# Altium PCB YQY.PcbDoc
Units mil, origin at the board's own origin, x right, y up, seen from the top; angles counter-clockwise.
Board outline 3346 x 2125 mil, 4 copper layers (Top Layer, Internal Plane 1, Internal Plane 2, Bottom Layer); 20 components, 16 nets, 81 pads, 0 vias.
Unrouted connection lines stored in the file: 59.
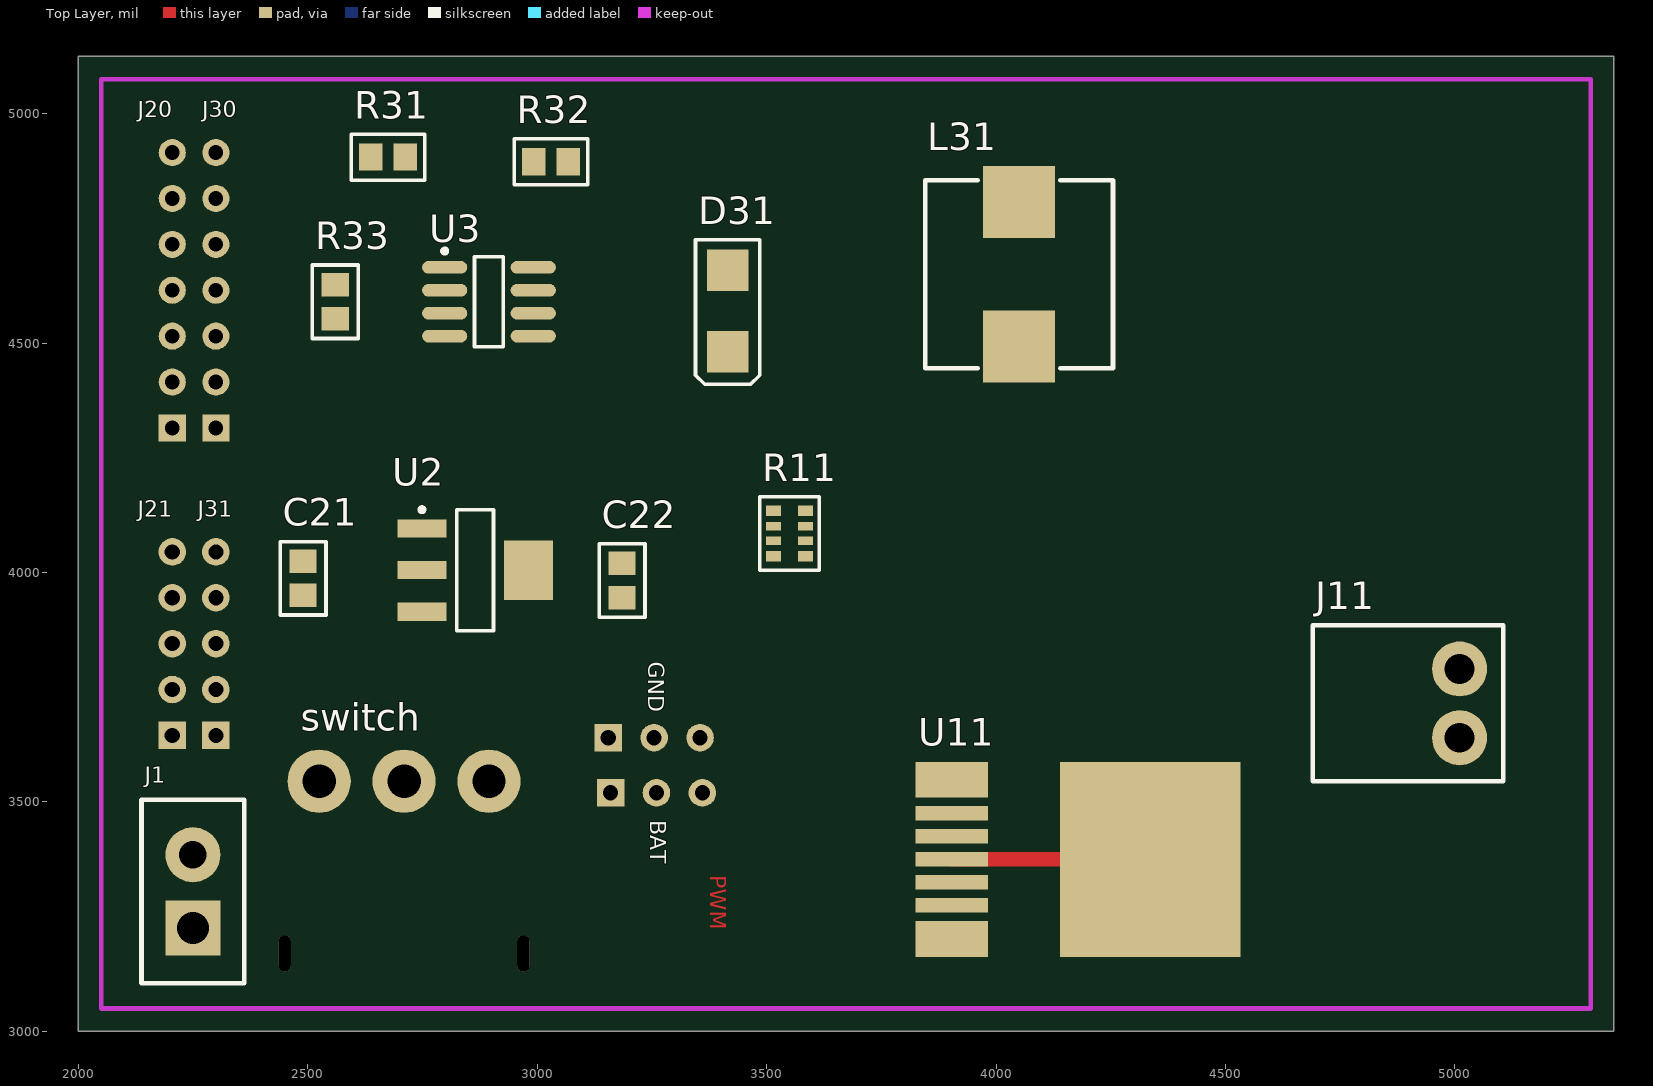
[diagram p0: Top Layer view]
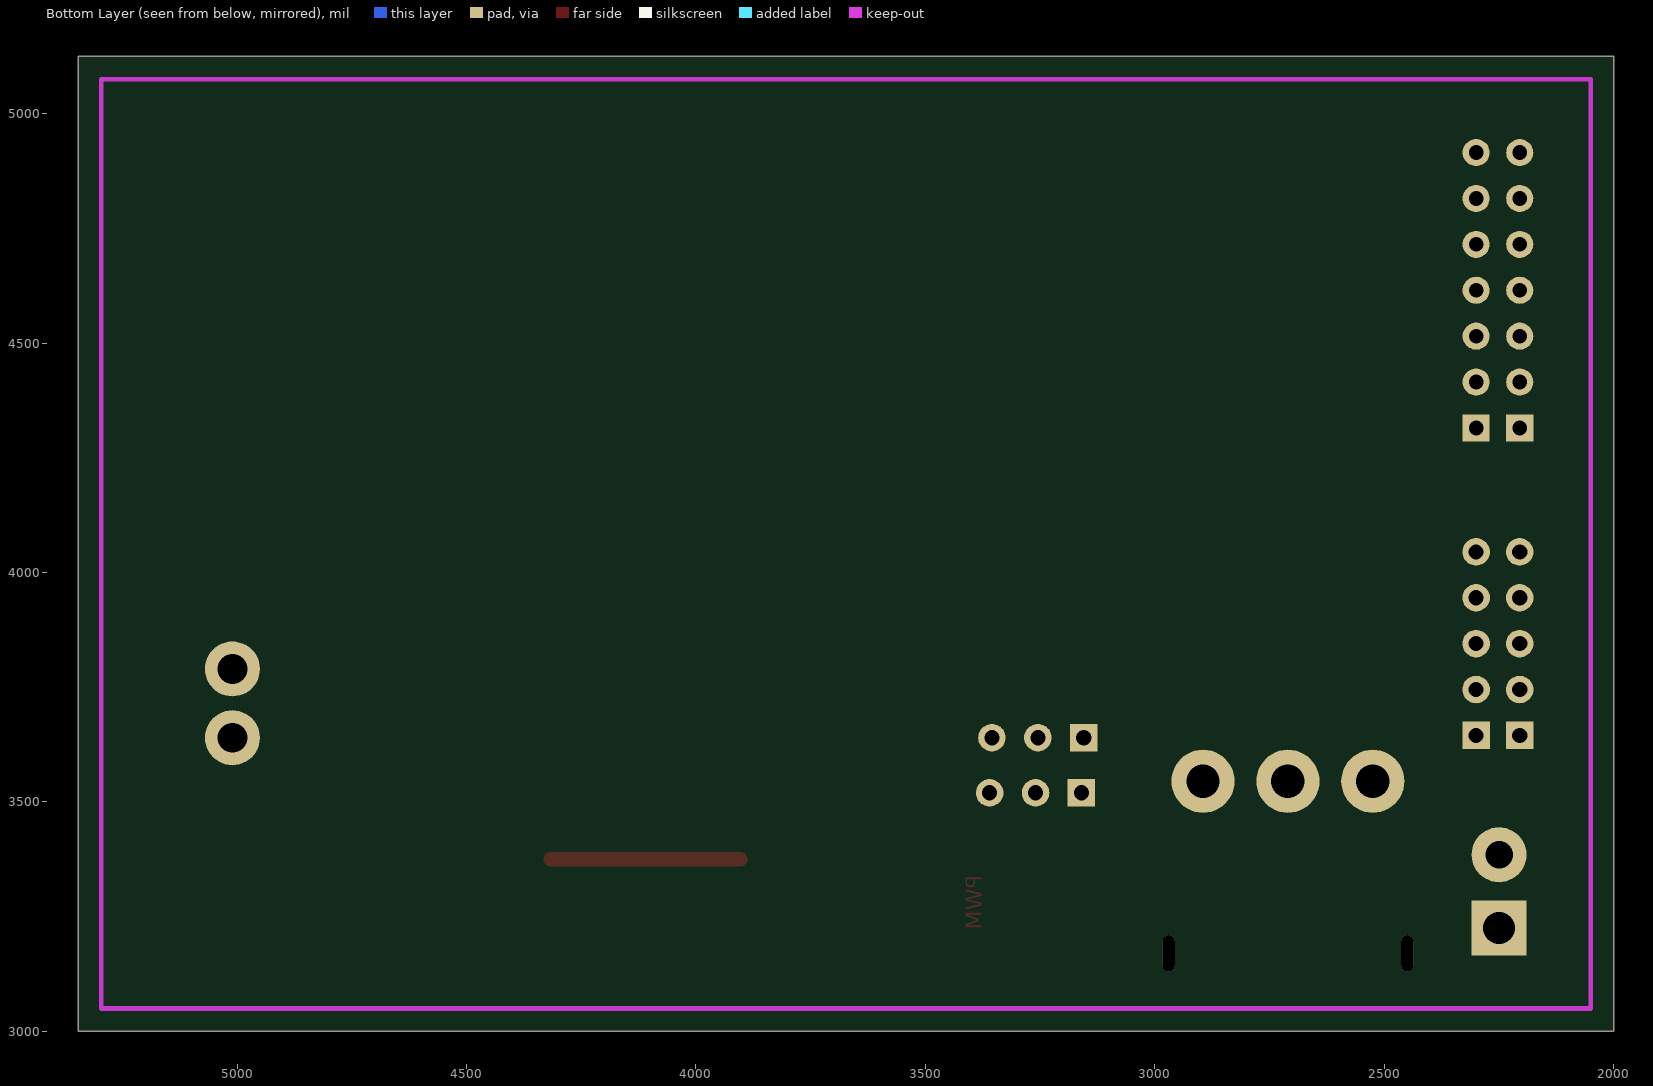
[diagram p1: Bottom Layer view, seen from below]
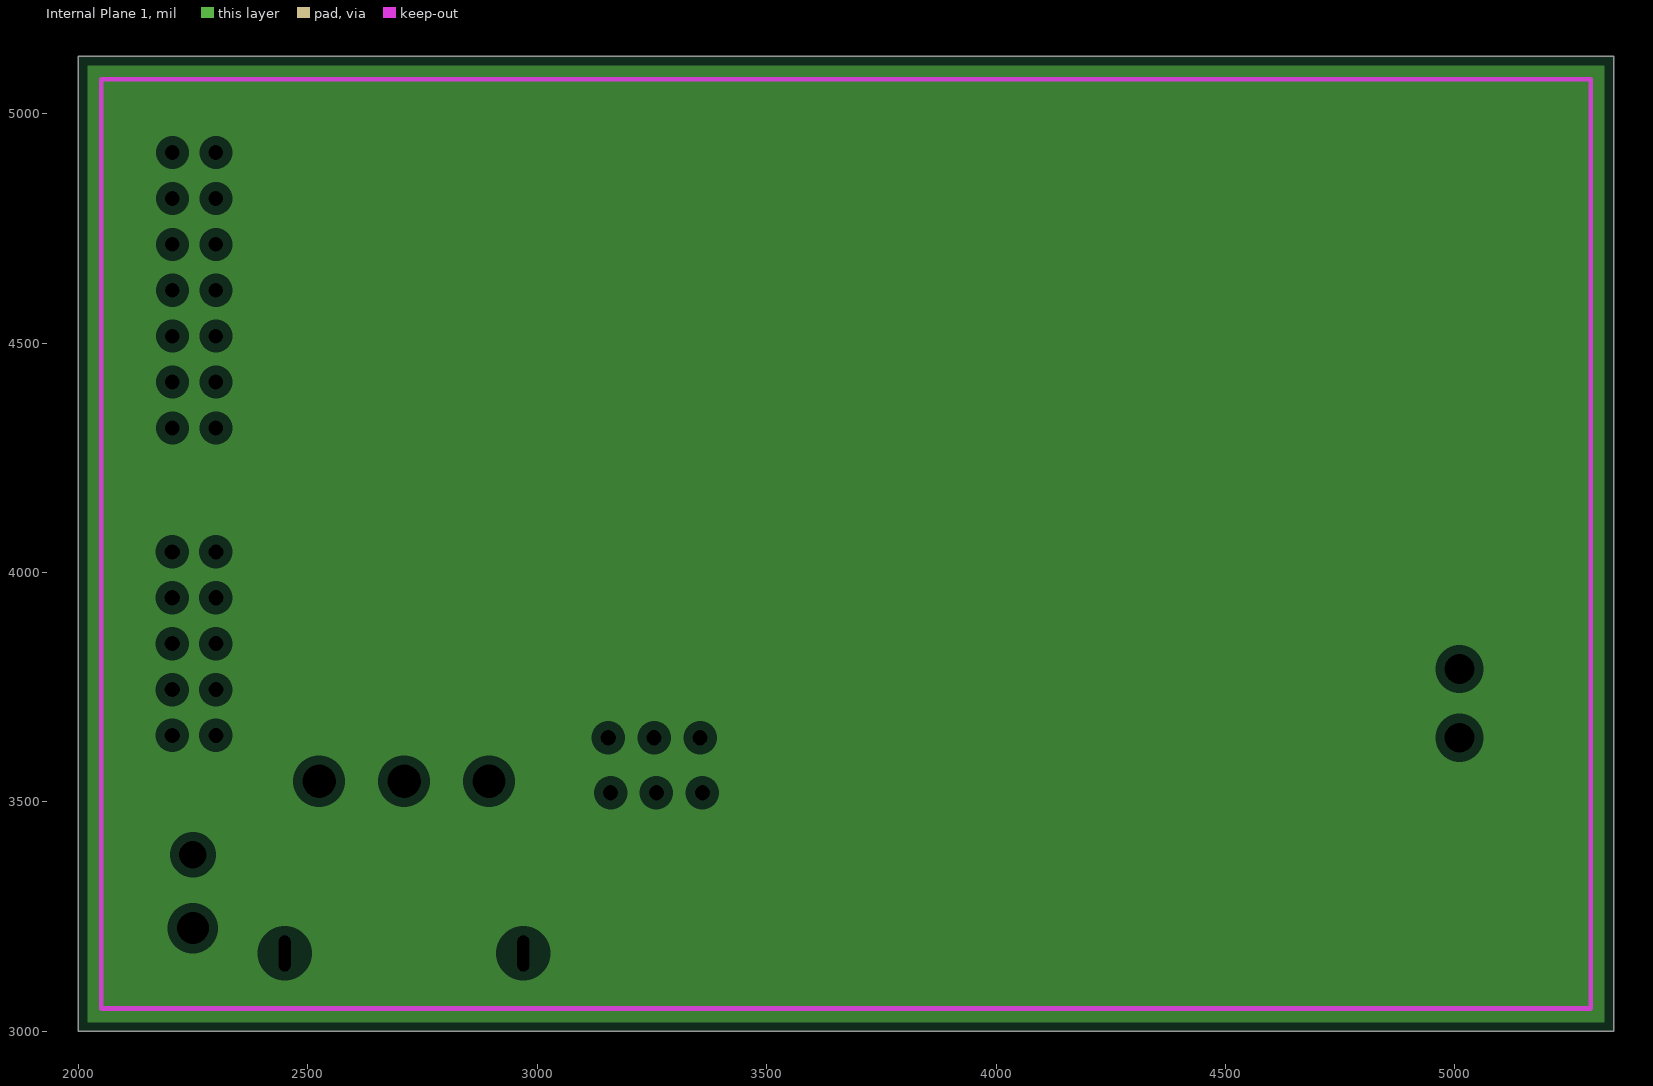
[diagram p2: Internal Plane 1, clearances drawn from the general rule]
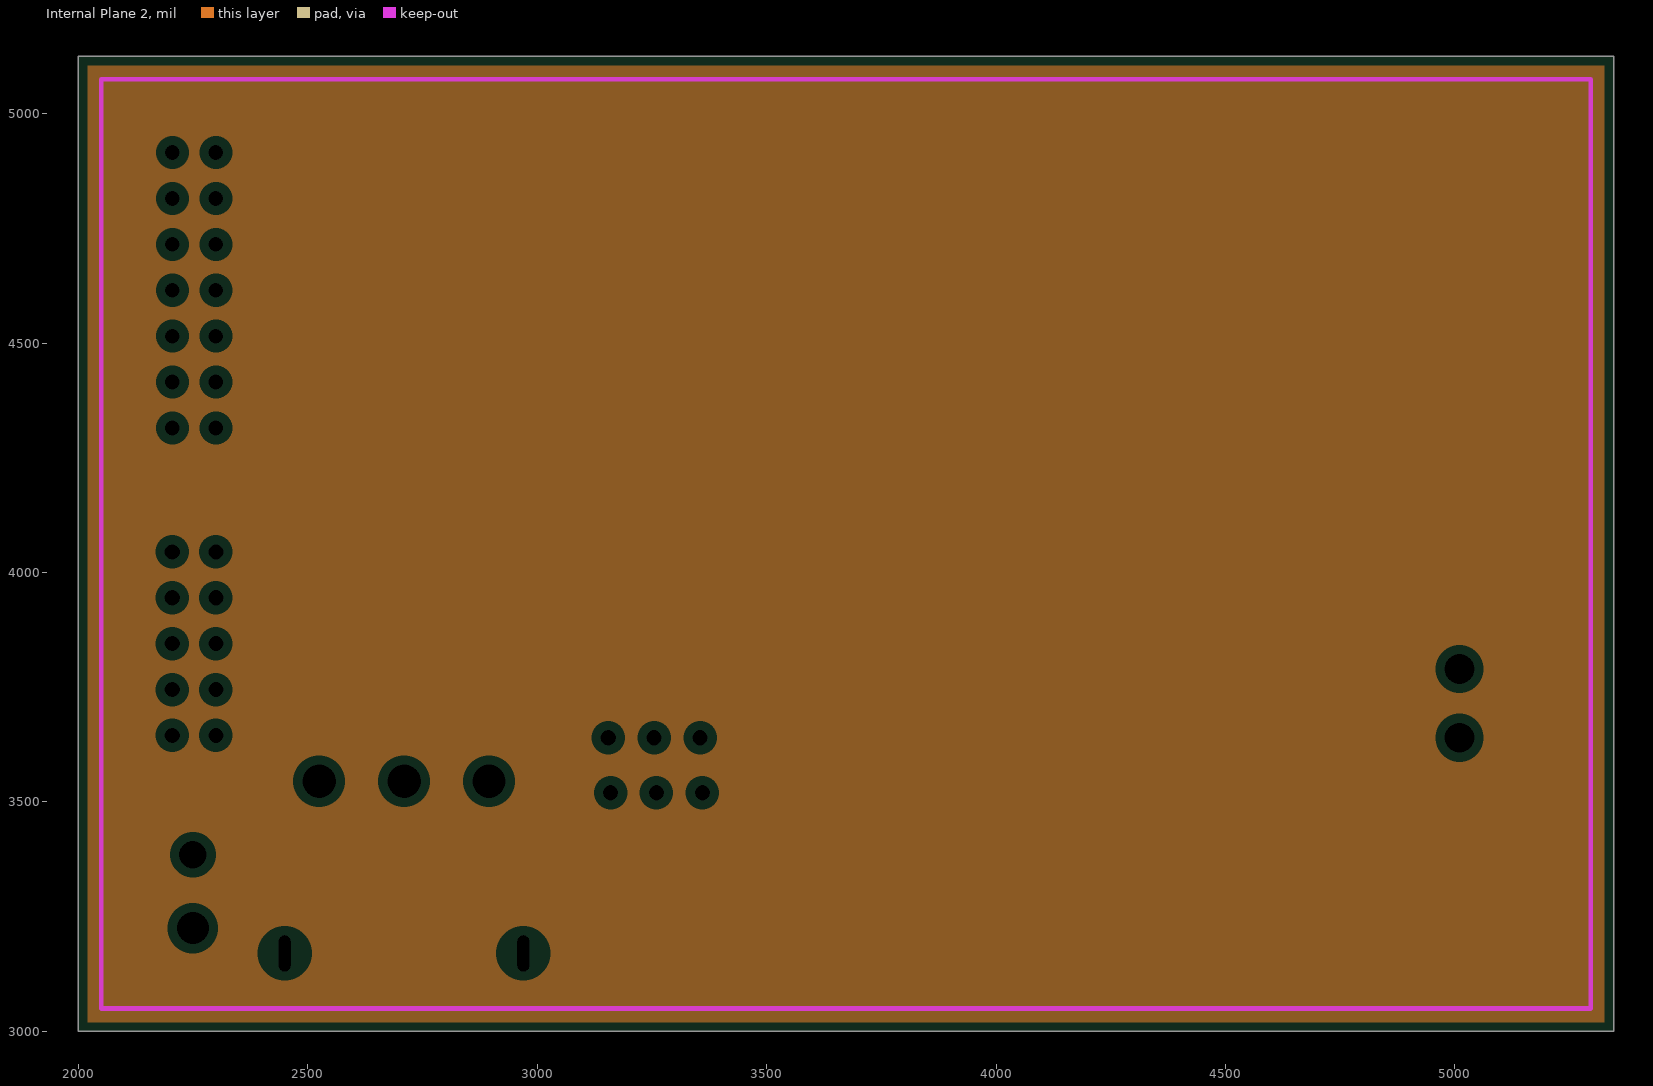
[diagram p3: Internal Plane 2, clearances drawn from the general rule]

## Layer stack, top to bottom
Top Layer: signal copper 1.4
Dielectric: dielectric 12.6, FR-4, Dk 4.8
Internal Plane 1: plane copper 1.4
Dielectric: dielectric 12.6, FR-4, Dk 4.8
Internal Plane 2: plane copper 1.4
Dielectric: dielectric 12.6, FR-4, Dk 4.8
Bottom Layer: signal copper 1.4

## Board outline
2000,3000 5346,3000 5346,5125 2000,5125

## Design rules (kind name [scope] priority, off if disabled: settings)
Clearance [All] p1: gap=8
PlaneClearance [All] p1: clearance=20
PlaneConnect [All] p1: planeconnectstyle=Relief reliefexpansion=20 reliefentries=4 reliefconductorwidth=10 reliefairgap=10
PolygonConnect [All] p1: connectstyle=Relief reliefconductorwidth=10 reliefentries=4 polygonreliefangle="90 Angle"
RoutingVias [All] p1: holewidth=25 width=40 viastyle="Through Hole" minholewidth=28 minwidth=50 maxholewidth=28 maxwidth=50
SilkscreenOverComponentPads [All] p1: minsilkscreentomaskgap=10
SolderMaskExpansion [All] p1: expansion=4
Width [All] p1: maxlimit=8 minlimit=8 preferedwidth=8
25 further rules are at their usual default settings.

## Components (designator, comment, footprint, x,y, rotation, side; value= is the part's Value field where it differs from the comment)
BAT "3 端口" SIP3 3260,3520 r0 top (schematic designator J32)
C21 "10uF" 0805 2490,3987.4 r90 top
C22 "10uF" 0805 3185,3982.4 r90 top
D31 "SK54" SMC/DO-214AB 3415,4570 r270 top
GND "3 端口" SIP3 3255,3640 r0 top (schematic designator J22)
J1 "电源接口" DC12V 2250,3305 r90 top
J11 "马达接口" MOTOR-W 5010,3715 r90 top
J20 "7 端口" SIP7 2205,4565 r90 top
J21 "5 端口" SIP5 2205,3845 r90 top
J30 "7 端口" SIP7 2300,4565 r90 top
J31 "5 端口" SIP5 2300,3845 r90 top
L31 "15uH" 4040电感 4050,4650 r270 top
R11 "10K" PZ-4 3550,4085 r90 top
R31 "6.8K" 0805 2675,4905 r180 top
R32 "1.3K" 0805 3030,4895 r180 top
R33 "2.7K" 0805 2560,4590 r90 top
switch "开关" 5A120V开关 2710,3170 r0 top (schematic designator 拨动开关)
U2 "AMS1117-3.3" MP04A_M 2865,4005 r0 top
U3 "AS1015" SOP8_M 2895,4590 r0 top
U11 "BTN7971B" TO263-7-1 4100,3375 r270 top

## Footprints (in the part's own frame and the unit in brackets; to place one, negate y for a bottom-side part, rotate by r counter-clockwise, add the part's x,y. Pads: shape width x height; smd on the part's side, far side on the other; paste and mask are expansions set on the pad)
5A120V开关 [mm]
  round 3.5 hole 1.85: 1(0,9.53) 2(4.7,9.53) ""(-4.7,9.53)
  oval 0.66x2 hole 0.66 slot 2 at 90 deg: ""(-6.605,0) ""(6.605,0)
0805 [mm]
  rect 1.3x1.5 smd: 1(-0.95,0) 2(0.95,0)
  silkscreen extent -2.03,-1.27 2.03,1.27
4040电感 [mm]
  rect 4x4 smd: 1(-4,0) 2(4,0)
  silkscreen extent -5.2,-5.2 5.2,5.2
DC12V [mil]
  rect 120x120 hole 70: 1(-80,0)
  round 120 hole 60: 2(80,0)
  silkscreen extent -200,-112 200,112
MOTOR-W [mil]
  round 120 hole 65: 1(-75,0) 2(75,0)
  silkscreen extent -170,-95 170,320
MP04A_M [mm] "SOT223, 4-Leads, Body 6.5x3.5mm, Pitch 2.3mm, Lead Span 7mm, IPC Low Density"
  rect 2.7x1 smd: 1(-2.95,2.3) 2(-2.95,0) 3(-2.95,-2.3)
  rect 2.7x3.3 smd: 4(2.95,0)
  silkscreen extent -3.07,-3.35 1.02,3.47
PZ-4 [mm] "WWW.OURAVR.COM"
  rect 0.58x0.835 smd: 1(-1.27,-0.887) 4(1.27,-0.887) 5(1.27,0.887) 8(-1.27,0.887)
  rect 0.457x0.835 smd: 2(-0.4,-0.887) 3(0.4,-0.887) 6(0.4,0.887) 7(-0.4,0.887)
  silkscreen extent -2.03,-1.65 2.03,1.65
SIP3 [mil]
  rect 60x60 hole 33: 1(-100,0)
  round 60 hole 33: 2(0,0) 3(100,0)
SIP5 [mil]
  rect 60x60 hole 33: 1(-200,0)
  round 60 hole 33: 2(-100,0) 3(0,0) 4(100,0) 5(200,0)
SIP7 [mm]
  rect 1.5x1.5 hole 0.813: 1(-6.35,0)
  round 1.5 hole 0.813: 2(-3.81,0) 3(-1.27,0) 4(1.27,0) 5(3.81,0) 6(6.35,0) 7(8.89,0)
SMC/DO-214AB [mm]
  rect 2.3x2.3 smd: 1(-2.25,0) 2(2.25,0)
  silkscreen extent -3.94,-1.78 4.06,1.78
SOP8_M [mm] "SOIC, 8-Leads, Body 4.9x3.9mm, Pitch 1.27mm, IPC Low Density"
  oval 2.5x0.7 smd: 1(-2.45,1.905) 2(-2.45,0.635) 3(-2.45,-0.635) 4(-2.45,-1.905) 5(2.45,-1.905) 6(2.45,-0.635) 7(2.45,0.635) 8(2.45,1.905)
  silkscreen extent -2.57,-2.5 0.8,2.93
TO263-7-1 [mm]
  rect 1.99x4 smd: 1(-4.405,-5) 7(4.405,-5)
  rect 0.8x4 smd: 2(-2.54,-5) 3(-1.27,-5) 4(0,-5) 5(1.27,-5) 6(2.54,-5)
  rect 10.8x10 smd: 4(0,6)
  Top Layer lines w0.8: 0,-5 0,5.5

## Part data
BAT GND: library part "3 端?"
C21 C22: library part C
D31: library part D
J1: library part 电源
J11: library part 马达
J20 J30: library part "7 端?"
J21 J31: library part "5 端?"
R11: library part "Res Pack", "Isolated Resistor Network - Parts"
R31 R32 R33: library part R
U2: library part LM1117MP-3.3, "800mA Low-Dropout Linear Regulator"

## Nets (pads, with @x,y where several pads share a name; then routed paths per layer and width w, separated by ;. In a path a pad name is that pad's centre, name@x,y a point inside that pad or via, vN(x,y) a via of type N, cw(c..) or ccw(c..) an arc to the next point about the centre after c; other vN are vias at no path point)
BAT: J1.1 switch.1
GND: C21.2 C22.2 D31.1 GND.1 GND.2 J1.2 J20.1 J20.2 J20.3 J20.4 J20.5 J20.6 J20.7 J21.1 J21.2 J21.3 J21.4 J21.5 R32.1 U2.1 U3.7 U3.8 U11.1 U11.5
M1A: J11.1 U11.4
M1B: J11.2
NetD31_2: D31.2 L31.1 U3.5 U3.6
NetR11_5: R11.5 U11.2
NetR11_6: R11.6 U11.3
NetR11_7: R11.7
NetR11_8: R11.8
NetR31_1: R31.1 R32.2 U3.1
NetR33_1: R33.1 U3.3
PWM1: GND.3 R11.4
PWM2: BAT.3 R11.2
VCC: J30.1 J30.2 J30.3 J30.4 J30.5 J30.6 J30.7 L31.2 R11.1 R11.3 R31.2
VDD: C22.1 J31.1 J31.2 J31.3 J31.4 J31.5 U2.2
VIN: BAT.1 BAT.2 C21.1 R33.2 switch.2 U2.3 U3.2 U3.4 U11.7
pads on no net: switch. U2.4 U11.6

## Polygon pours and split planes (outlines as drawn)
no net on Internal Plane 1 (split plane): 5346,3000 2000,3000 2000,5125 5346,5125
no net on Internal Plane 2 (split plane): 5346,3000 2000,3000 2000,5125 5346,5125

## Keep-outs
Keep-Out Layer:
  lines w10: 2050,3050 5296,3050 5296,5075 2050,5075 2050,3050

## Other copper
Top Layer:
  text "PWM" at 3365,3340 h60 r270

## Silkscreen, mask and mechanical layers (free items; w line width, h text height)
Drill Drawing:
  text ".LEGEND" at 5546,3200 h60
  text "Drill Drawing." at 5546,3100 h60

## Dimensions
2050,3050 to 5296,3050 on Mechanical 1
2050,3050 to 2050,5075 on Mechanical 1